# Altium PCB Main.PcbDoc (part 2 of 2)
Units mm, origin at the board's own origin, x right, y up, seen from the top; angles counter-clockwise.
Board outline 97 x 100 mm, 2 copper layers (Top Layer, Bottom Layer); 183 components, 114 nets, 627 pads, 356 vias.
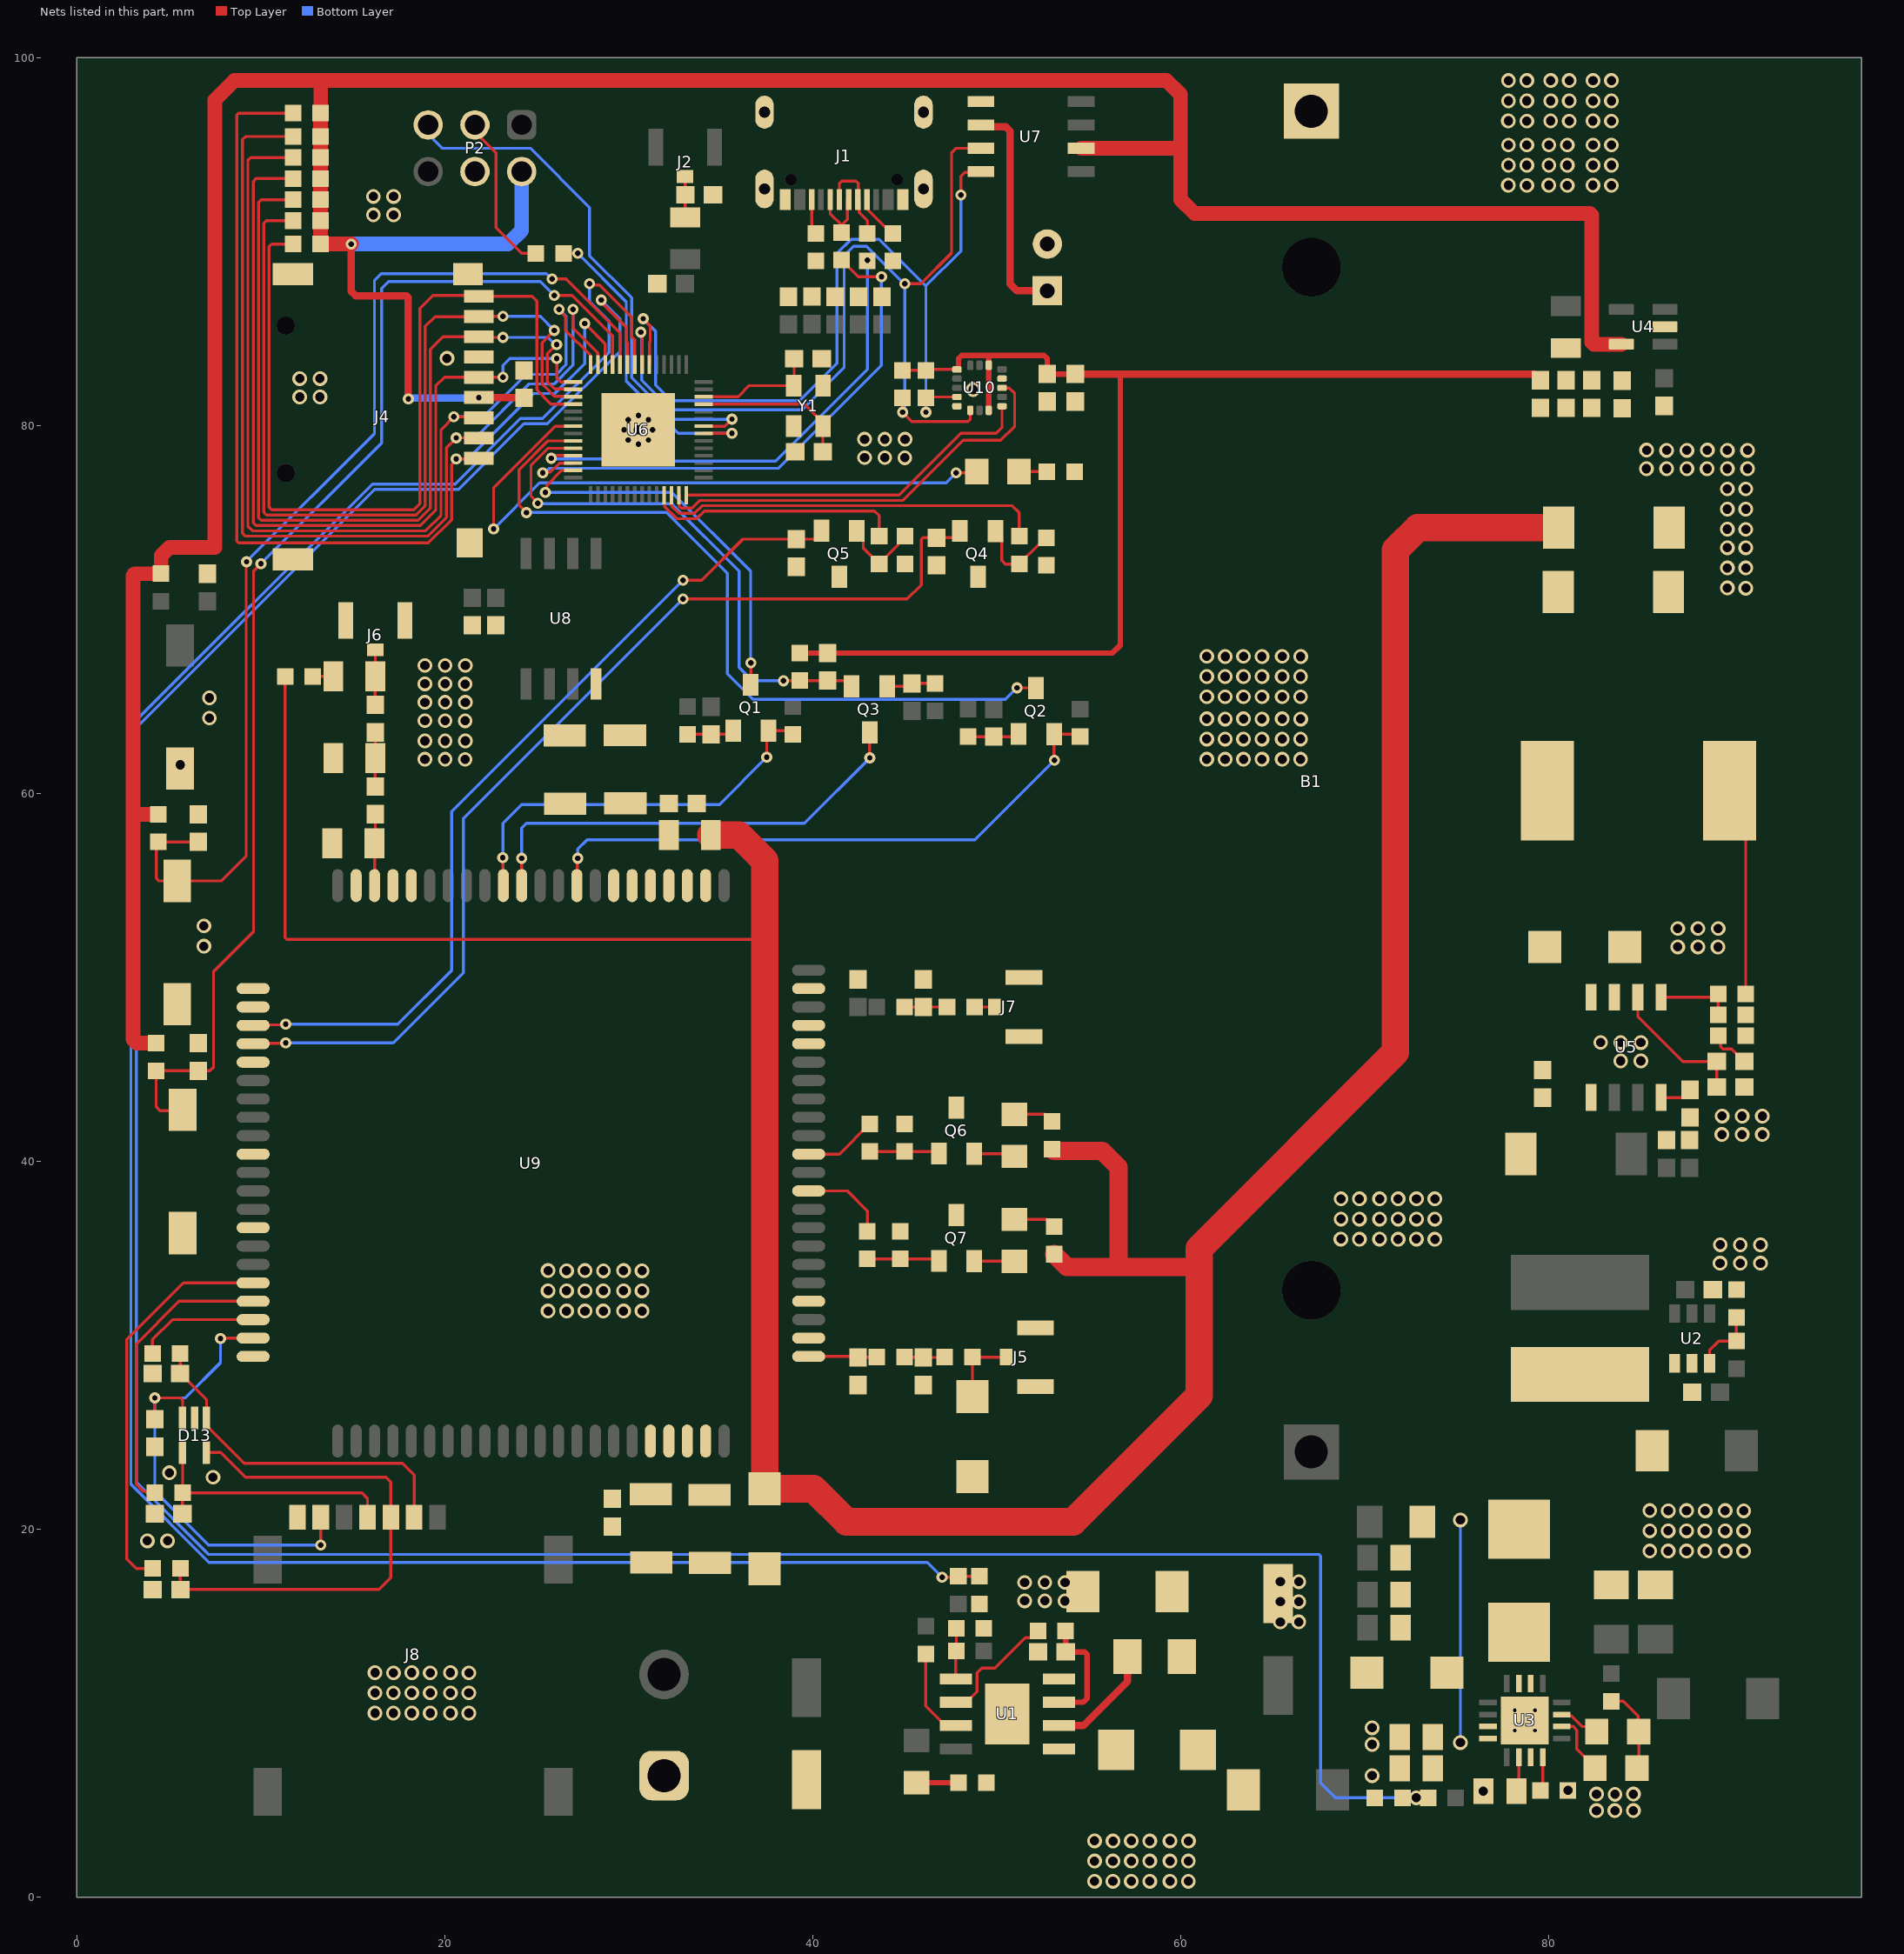
[diagram p2: the nets of this part, all layers, seen from the top]

## Via types
v1: diameter 0.8, hole 0.5, Top Layer to Bottom Layer, tented both sides, 283 vias
v2: diameter 0.6, hole 0.3, Top Layer to Bottom Layer, tented both sides, 69 vias
v3: diameter 0.5, hole 0.2, Top Layer to Bottom Layer, 4 vias

## Nets (pads, with @x,y where several pads share a name; then routed paths per layer and width w, separated by ;. In a path a pad name is that pad's centre, name@x,y a point inside that pad or via, vN(x,y) a via of type N, cw(c..) or ccw(c..) an arc to the next point about the centre after c; other vN are vias at no path point) (continued)
GND: B1.2 C2.2 C3.1 C4.1 C5.1 C6.2 C7.1 C8.1 C9.1 C10.1 C11.1 C12.1 C13.1 C14.1 C15.1 C16.1 C18.2 C19.2 C20.1 C22.1 C23.1 C24.2 C25.1 C26.1 C27.1 C28.1 C29.2 C30.1 C31.1 C32.1 C33.1 C34.1 C35.2 C36.1 C37.1 C38.2 C39.2 C40.1 C41.1 C42.1 C43.2 C44.1 C45.1 C48.1 C49.1 C50.2 C51.2 C52.2 C53.2 C54.1 C55.2 C56.2 C57.1 C58.2 C59.2 C64.2 C65.2 C66.1 C67.1 D4.1 D6.1 D9.1 D11.1 D12.1 D13.2 J1.A1/B12 J1.A12/B1 J1.Shell J3.2 J4.6 J4.Shell J5.2 J6.2 J7.2 J8.5 L8.1 L9.1 P1.1 P2.4 Q4.3 Q5.3 Q6.3 Q7.3 R1.2 R6.1 R7.1 R9.2 R13.1 R14.1 R16.1 R17.1 R20.2 R21.2 R25.2 R52.2 R53.2 R58.1 R59.1 SW1.1 SW2.1 SW3.1 U1.4 U1.EXP U2.2 U3.7 U3.11 U3.17 U4.2 U5.7 U6.57 U7.5 U8.4 U9.1 U9.2 U9.5 U9.10 U9.14 U9.37 U9.40 U9.41 U9.43 U9.57 U9.58 U9.60 U9.61 U9.64 U9.65 U9.77 U9.78 U9.80 U9.81 U10.5 U10.12 Y1.2 Y1.4
  other v1: 55.312,0.86 56.312,0.86 57.312,0.86 58.312,0.86 59.412,0.86 60.412,0.86 55.312,1.96 56.312,1.96 57.312,1.96 58.312,1.96 59.412,1.96 60.412,1.96 56.318,3.048 58.318,3.048 60.418,3.048 55.312,3.06 57.312,3.06 59.412,3.06 82.6,4.7 83.6,4.7 84.6,4.7 83.606,5.588 82.6,5.6 84.6,5.6 76.45,5.75 81.05,5.8 70.4,6.6 70.4,8.3 70.4,9.2 16.2,10 17.2,10 18.2,10 19.2,10 20.3,10 21.3,10 16.2,11.1 17.2,11.1 18.2,11.1 19.2,11.1 20.3,11.1 21.3,11.1 17.206,12.188 19.206,12.188 21.306,12.188 16.2,12.2 18.2,12.2 20.3,12.2 65.412,14.96 66.412,14.96 65.412,16.06 66.412,16.06 51.512,16.106 52.612,16.106 53.7,16.1 51.512,17.106 52.612,17.106 53.712,17.106 66.418,17.148 65.412,17.16 85.494,18.812 86.494,18.812 87.494,18.812 88.494,18.812 89.594,18.812 90.594,18.812 3.825,19.366 4.925,19.366 85.494,19.912 86.494,19.912 87.494,19.912 88.494,19.912 89.594,19.912 90.594,19.912 86.5,21 88.5,21 90.6,21 85.494,21.012 87.494,21.012 89.594,21.012 7.391,22.826 5.025,23.066 25.612,31.86 26.612,31.86 27.612,31.86 28.612,31.86 29.712,31.86 30.712,31.86 25.612,32.96 26.612,32.96 27.612,32.96 28.612,32.96 29.712,32.96 30.712,32.96 25.612,34.06 26.618,34.048 27.612,34.06 28.618,34.048 29.712,34.06 30.718,34.048 89.312,34.46 90.412,34.46 91.512,34.46 90.412,35.46 91.512,35.46 89.325,35.466 69.712,35.76 71.812,35.76 73.812,35.76 68.706,35.772 70.806,35.772 72.806,35.772 68.712,36.86 69.712,36.86 70.812,36.86 71.812,36.86 72.812,36.86 73.812,36.86 68.712,37.96 69.712,37.96 70.812,37.96 71.812,37.96 72.812,37.96 73.812,37.96 89.412,41.46 90.512,41.46 91.612,41.46 89.425,42.466 90.512,42.46 91.612,42.46 83.912,45.46 85.012,45.46 82.825,46.466 83.912,46.46 85.012,46.46 87.012,51.66 88.112,51.66 89.2,51.654 6.9,51.7 87.012,52.66 88.112,52.66 89.212,52.66 6.9,52.8 5.612,61.56 18.912,61.86 20.012,61.86 21.1,61.854 61.412,61.86 62.412,61.86 63.412,61.86 64.412,61.86 65.512,61.86 66.512,61.86 18.912,62.86 20.012,62.86 21.112,62.86 61.412,62.96 62.412,62.96 63.412,62.96 64.412,62.96 65.512,62.96 66.512,62.96 18.912,63.96 20.012,63.96 21.1,63.954 61.412,64.06 62.418,64.048 63.412,64.06 64.418,64.048 65.512,64.06 66.518,64.048 7.2,64.1 18.912,64.96 20.012,64.96 21.112,64.96 7.2,65.2 61.412,65.26 62.412,65.26 63.412,65.26 64.412,65.26 65.512,65.26 66.512,65.26 18.912,65.96 20.012,65.96 21.1,65.954 61.412,66.36 62.412,66.36 63.412,66.36 64.412,66.36 65.512,66.36 66.512,66.36 18.912,66.96 20.012,66.96 21.112,66.96 61.412,67.46 62.418,67.448 63.412,67.46 64.418,67.448 65.512,67.46 66.518,67.448 89.706,71.172 90.712,71.16 89.712,72.26 90.712,72.26 89.712,73.36 90.712,73.36 89.706,74.372 90.712,74.36 89.712,75.46 90.712,75.46 89.712,76.56 90.712,76.56 85.312,77.66 86.412,77.66 87.512,77.66 88.612,77.66 89.712,77.66 90.812,77.66 42.812,78.26 43.912,78.26 45,78.254 85.325,78.666 86.412,78.66 87.512,78.66 88.625,78.666 89.712,78.66 90.812,78.66 42.812,79.26 43.912,79.26 45.012,79.26 30.518,79.772 12.112,81.56 13.212,81.56 48.712,81.96 12.112,82.56 13.212,82.56 20.112,83.66 16.112,91.46 17.212,91.46 16.112,92.46 17.212,92.46 78.812,93.06 81.012,93.06 83.412,93.06 77.806,93.072 80.006,93.072 82.406,93.072 77.812,94.16 78.812,94.16 80.012,94.16 81.012,94.16 82.412,94.16 83.412,94.16 77.812,95.26 78.812,95.26 80.012,95.26 81.012,95.26 82.412,95.26 83.412,95.26 77.806,96.572 78.812,96.56 80.106,96.572 81.112,96.56 82.406,96.572 83.412,96.56 77.812,97.66 78.812,97.66 80.112,97.66 81.112,97.66 82.412,97.66 83.412,97.66 77.812,98.76 78.812,98.76 80.112,98.76 81.112,98.76 82.412,98.76 83.412,98.76
  other v2: 30.518,78.994 29.968,79.222 31.068,79.222 29.74,79.772 31.296,79.772 29.968,80.322 31.068,80.322 30.518,80.549
  other v3: 78.15,9.05 79.25,9.05 78.15,10.15 79.25,10.15
GNSS-ANT: C46.2 L8.2 U9.79 | length 3.9
  Top Layer w0.16: U9.79@16.176,54.994 16.176,57.281 L8.2@16.164,57.293 16.217,57.346 C46.2@16.217,58.879
I2C0-SCL: R19.1 U6.6 U7.8 U10.4 | length 47.1
  Top Layer w0.16: v2(30.778,85.812) 31.16,85.43 31.16,84.581 31.118,84.539 U6.6@31.118,83.322 ; v2(46.145,80.732) R19.1@46.145,81.506 46.197,81.558 U10.4@47.835,81.558 ; v2(48.05,92.543) 48.05,93.559 48.264,93.773 49.095,93.773 U7.8@49.135,93.813
  Bottom Layer w0.16: v2(30.778,85.812) 31.461,85.129 31.461,82.208 32.302,81.367 39.287,81.367 41.319,83.399 41.319,89.368 42.081,90.13 43.605,90.13 46.145,87.59 ; v2(46.145,80.732) 46.145,87.59 ; v2(48.05,92.543) 48.05,89.495 46.145,87.59
I2C0-SDA: R18.1 U6.7 U7.7 U10.6 | length 50
  Top Layer w0.16: v2(30.653,85.081) 30.728,85.006 30.728,83.332 U6.7@30.718,83.322 ; R18.1@44.875,81.506 v2(44.875,80.732) 45.383,80.224 48.431,80.224 48.558,80.351 48.558,80.831 U10.6@48.56,80.833 ; v2(45.002,87.717) 45.875,87.717 47.542,89.384 47.542,94.829 47.796,95.083 U7.7@49.135,95.083
  Bottom Layer w0.16: v2(30.653,85.081) 30.698,85.036 30.698,82.463 32.302,80.859 39.414,80.859 41.7,83.145 41.7,89.241 42.208,89.749 42.925,89.749 44.957,87.717 v2(45.002,87.717) 45.002,81.046 44.959,81.003 44.959,80.816 v2@44.939,80.795
MAIN-ANT: C44.2 R36.1 U9.82 | length 3.7
  Top Layer w0.16: U9.82@39.776,29.394 42.403,29.394 C44.2@42.456,29.341 42.468,29.353 R36.1@43.484,29.353
NET-LIGHT: R54.2 U9.51 | length 4
  Top Layer w0.16: U9.51@39.776,40.394 41.444,40.394 R54.2@43.091,42.041
NetC1_1: C1.1 U1.2 | length 6.1
  Top Layer w0.4: U1.2@53.375,9.322 54.701,9.322 57.107,11.728 C1.1@57.107,13.076
NetC1_2: C1.2 D4.2 L2.1 U1.1
NetC3_2: C3.2 R2.2 U1.3 | length 6.4
  Top Layer w0.3: U1.3@53.375,10.592 54.701,10.592 54.899,10.79 54.899,13.203 54.772,13.33 C3.2@53.744,13.33 R2.2@53.744,14.473
NetC9_2: C9.2 C11.2 L3.2 R10.1 U3.8 | length 12.1
  Bottom Layer w0.16: v1(75.2,8.4) v1(75.2,20.5)
NetC16_2: C16.2 U3.10 | length 1.9
  Top Layer w0.16: C16.2@78.25,5.75 78.375,5.875 U3.10@78.375,7.6
NetC17_1: C17.1 U5.1 | length 0
  Top Layer w0.16: C17.1@79.667,43.462 C17.1@79.677,43.472
NetC17_2: C17.2 D9.2 L4.1 U5.8
NetC20_2: C20.2 C21.2 U5.6 | length 7.8
  Top Layer w0.16: U5.6@84.843,48.922 84.843,47.876 87.293,45.426 89.133,45.426 C21.2@89.139,45.432 C20.2@89.139,44.035
NetC21_1: C21.1 R16.2 | length 2.3
  Top Layer w0.16: R16.2@89.21,46.823 89.349,46.685 89.349,46.227 89.461,46.114 89.932,46.114 90.614,45.432 C21.1@90.639,45.432
NetC25_2: C25.2 U5.4 | length 1.7
  Top Layer w0.16: U5.4@86.113,43.472 87.279,43.472 87.674,43.867 C25.2@87.674,43.89
NetC27_2: C27.2 J2.1 L5.2 | length 6.6
  Top Layer w0.16: L5.2@33.058,91.326 J2.1@33.058,93.539 ; L5.2@33.058,91.326 J2.1@33.058,93.539 ; L5.2@33.058,91.326 J2.1@33.058,93.539
NetC45_2: C45.2 R36.2 R37.1 | length 2.2
  Top Layer w0.16: R36.2@44.984,29.353 46,29.353 C45.2@46.012,29.341 47.155,29.341 R37.1@47.167,29.353
NetC46_1: C46.1 C47.2 L9.2 | length 2.9
  Top Layer w0.16: C46.1@16.217,60.379 16.214,60.382 L9.2@16.214,61.915 16.217,61.918 C47.2@16.217,63.324
NetC47_1: C47.1 J6.1 L7.1 | length 3
  Top Layer w0.16: C47.1@16.217,64.824 16.214,64.827 L7.1@16.214,66.36 16.217,66.363 J6.1@16.217,67.808
NetC49_2: C49.2 R39.2 R40.1 | length 2.3
  Top Layer w0.16: R39.2@44.984,48.394 C49.2@46.012,48.394 R40.1@47.294,48.394
NetC50_1: C50.1 D13.4 J8.2 R43.1 | length 14.5
  Top Layer w0.16: C50.1@5.735,20.839 R43.1@5.735,21.982 ; D13.4@5.744,24.166 5.744,21.991 R43.1@5.735,21.982 ; J8.2@15.792,20.661 15.792,21.677 15.487,21.982 R43.1@5.735,21.982
NetC51_1: C51.1 D13.1 J8.3 R42.1 | length 19.2
  Top Layer w0.16: R42.1@5.608,29.551 C51.1@5.608,28.459 5.633,28.459 7.044,27.048 D13.1@7.044,26.046 7.044,25.631 9.093,23.582 17.697,23.582 18.332,22.947 J8.3@18.332,20.661
NetC52_1: C52.1 D13.5 J8.7 R41.1 | length 28.7
  Top Layer w0.16: R41.1@5.62,17.867 C52.1@5.62,16.724 16.427,16.724 17.062,17.359 J8.7@17.062,20.661 17.062,22.566 16.808,22.82 9.152,22.82 7.806,24.166 D13.5@7.044,24.166
NetC60_1: C60.1 Q3.2 R44.1 U6.24 | length 29.2
  Top Layer w0.16: v2(25.042,75.785) 25.042,75.822 24.679,76.185 24.679,77.845 25.606,78.772 U6.24@26.968,78.772 ; v2(38.398,66.127) 39.275,66.127 R44.1@39.287,66.139 C60.1@40.811,66.139 41.798,66.139 Q3.2@42.11,65.827
  Bottom Layer w0.16: v2(25.042,75.785) 25.063,75.764 32.317,75.764 35.985,72.096 35.985,66.856 36.714,66.127 v2(38.398,66.127)
NetC61_2: C61.2 Q1.1 R47.2 | length 2.6
  Top Layer w0.16: R47.2@33.191,63.218 C61.2@34.461,63.218 35.478,63.218 Q1.1@35.674,63.414
NetC62_2: C62.2 Q2.1 R48.2 | length 2.8
  Top Layer w0.16: R48.2@48.431,63.091 C62.2@49.828,63.091 51.039,63.091 Q2.1@51.188,63.24
NetC63_2: C63.2 Q3.1 R49.2 | length 2.7
  Top Layer w0.16: Q3.1@44.036,65.821 45.216,65.821 C63.2@45.383,65.988 R49.2@46.653,65.988
NetD1_1: D1.1 L1.2 U2.1
NetD2_1: D2.1 L2.2
NetD3_2: D3.2 R1.1 | length 2.3
  Top Layer w0.3: D3.2@45.628,6.218 R1.1@47.926,6.218
NetD6_2: D6.2 L3.1 U3.2 U3.3
NetD7_1: D7.1 D8.1 R11.1 | length 4.7
  Top Layer w0.16: R11.1@83.4,10.65 84.05,10.65 84.1,10.6 84.855,9.845 84.855,9.045 D8.1@84.9,9 84.9,7.1 D7.1@84.8,7
NetD7_2: D7.2 U3.14 | length 3.4
  Top Layer w0.16: U3.14@80.7,9.275 81.325,9.275 81.527,9.073 81.527,8.05 82.514,7.063 D7.2@82.514,7
NetD8_2: D8.2 U3.15 | length 2.3
  Top Layer w0.16: U3.15@80.7,9.925 80.77,9.855 81.245,9.855 81.833,9.267 82.347,9.267 D8.2@82.614,9
NetD10_2: D10.2 R25.1 | length 1.5
  Top Layer w0.16: D10.2@51.197,77.497 R25.1@52.721,77.497
NetD11_2: D11.2 J5.1 R37.2 | length 4
  Top Layer w0.16: D11.2@48.679,27.21 48.679,29.341 R37.2@48.667,29.353 J5.1@50.508,29.353
NetD14_1: D14.1 R50.1 | length 2.2
  Top Layer w0.16: D14.1@50.965,42.561 52.604,42.561 R50.1@52.997,42.168
NetD14_2: D14.2 Q6.2 | length 2.3
  Top Layer w0.16: Q6.2@48.775,40.422 50.818,40.422 D14.2@50.965,40.275
NetD15_1: D15.1 R51.1 | length 2.3
  Top Layer w0.16: D15.1@50.965,36.846 52.731,36.846 R51.1@53.124,36.453
NetD15_2: D15.2 Q7.2 | length 2.2
  Top Layer w0.16: Q7.2@48.775,34.58 50.945,34.58 D15.2@50.965,34.56
NetJ1_A5: J1.A5 R20.1 | length 2.5
  Top Layer w0.16: J1.A5@42.944,92.296 43.014,92.226 43.014,91.713 43.906,90.821 43.991,90.821 R20.1@44.361,90.451
NetJ1_B5: J1.B5 R21.1 | length 1.9
  Top Layer w0.16: J1.B5@39.944,92.296 39.944,90.677 R21.1@40.17,90.451
NetJ3_1: J3.1 U7.6 | length 12.2
  Top Layer w0.4: U7.6@49.135,96.353 49.235,96.253 50.483,96.253 50.717,96.019 50.717,87.717 51.098,87.336 J3.1@52.749,87.336
NetJ7_1: J7.1 R40.2 | length 1.1
  Top Layer w0.16: R40.2@48.794,48.394 J7.1@49.873,48.394
NetL7_2: L7.2 R38.2 | length 1.1
  Top Layer w0.16: R38.2@12.82,66.365 13.93,66.365 L7.2@13.934,66.36
NetQ1_3: Q1.3 U6.27 | length 21.3
  Top Layer w0.16: v2(25.464,76.377) 25.537,76.449 25.537,76.748 26.355,77.566 26.962,77.566 U6.27@26.968,77.572 ; Q1.3@36.619,65.909 36.629,65.919 v2(36.629,67.1)
  Bottom Layer w0.16: v2(25.464,76.377) 32.339,76.377 36.62,72.096 36.62,67.109 v2(36.629,67.1)
NetQ2_3: Q2.3 U6.23 | length 41.5
  Top Layer w0.16: v2(24.428,75.271) 24.025,75.674 24.025,77.596 25.6,79.172 U6.23@26.968,79.172 ; v2(51.098,65.746) 52.122,65.746 Q2.3@52.133,65.735
  Bottom Layer w0.16: v2@24.428,75.271 24.435,75.278 32.041,75.278 35.35,71.969 35.35,66.508 36.747,65.111 50.463,65.111 v2(51.098,65.746)
NetQ4_1: Q4.1 R52.1 R56.2 | length 4.8
  Top Layer w0.16: Q4.1@49.918,74.273 50.263,73.928 50.263,72.677 50.463,72.477 51.213,72.477 R56.2@51.225,72.489 52.274,73.538 52.327,73.538 R52.1@52.697,73.908
NetQ5_1: Q5.1 R53.1 R57.2 | length 4.4
  Top Layer w0.16: Q5.1@42.397,74.278 42.742,73.933 42.742,73.352 R57.2@43.605,72.489 44.632,73.516 44.632,73.619 R53.1@45.002,73.989
NetQ6_1: Q6.1 R54.1 R58.2 | length 3.8
  Top Layer w0.16: R54.1@43.091,40.541 R58.2@44.996,40.541 46.736,40.541 Q6.1@46.85,40.427
NetQ7_1: Q7.1 R55.1 R59.2 | length 3.9
  Top Layer w0.16: R55.1@42.964,34.699 R59.2@44.742,34.699 46.736,34.699 Q7.1@46.85,34.585
NetR2_1: R2.1 U1.6 | length 6.7
  Top Layer w0.16: U1.6@47.775,10.592 47.995,10.812 48.571,10.812 48.93,11.171 48.93,12.187 49.184,12.441 49.892,12.441 51.554,14.103 51.874,14.103 R2.1@52.244,14.473
NetR3_1: R3.1 R6.2 U1.5 | length 2.7
  Top Layer w0.16: U1.5@47.775,11.862 47.775,13.368 R3.1@47.793,13.386 47.799,13.392 R6.2@47.799,14.6
NetR4_1: R4.1 R7.2 U2.3 | length 3.7
  Top Layer w0.16: U2.3@88.745,29.019 88.745,29.733 89.242,30.23 R4.1@90.208,30.23 R7.2@90.208,31.524
NetR5_1: R5.1 U1.7 | length 4.9
  Top Layer w0.16: R5.1@46.136,13.227 46.136,10.385 47.2,9.322 U1.7@47.775,9.322
NetR8_2: R8.2 R9.1 U6.8 | length 133.7
  Top Layer w0.16: v2(27.857,87.717) 27.934,87.64 28.397,87.64 30.146,85.891 30.146,84.838 30.318,84.666 U6.8@30.318,83.322 ; v2(47.025,17.394) 47.864,17.394 R8.2@47.908,17.438 R9.1@49.051,17.438
  Bottom Layer w0.16: v2(27.857,87.717) 27.857,86.746 28.918,85.685 28.918,83.985 25.317,80.384 24.111,80.384 20.555,76.828 16.054,76.828 2.932,63.706 2.932,22.447 7.179,18.2 46.219,18.2 v2(47.025,17.394)
NetR12_1: R12.1 R13.2 U6.9 | length 168.4
  Top Layer w0.16: v2(28.492,86.828) 28.492,86.713 29.859,85.346 29.859,84.573 29.918,84.514 U6.9@29.918,83.322 ; R13.2@72.05,5.4 v1(72.8,5.4) R12.1@73.45,5.4
  Bottom Layer w0.16: v2(28.492,86.828) 29.508,85.812 29.508,84.034 25.571,80.097 24.301,80.097 20.745,76.541 16.173,76.541 3.219,63.587 3.219,22.566 7.155,18.63 67.506,18.63 67.6,18.536 67.6,6.2 68.4,5.4 v1(72.8,5.4)
NetR14_2: R14.2 U3.12 | length 1.9
  Top Layer w0.16: R14.2@79.55,5.8 79.675,5.925 U3.12@79.675,7.6
NetR15_1: R15.1 R17.2 U5.5 | length 4.3
  Top Layer w0.16: U5.5@86.113,48.922 89.023,48.922 R15.1@89.21,49.109 R17.2@89.21,47.966
NetR22_1: R22.1 U6.49 | length 17.3
  Top Layer w0.16: R22.1@26.448,89.368 v2(27.222,89.368) ; U6.49@34.068,79.572 34.077,79.58 35.596,79.58 v2(35.604,79.589)
  Bottom Layer w0.16: v2(27.222,89.368) 29.859,86.731 29.859,82.413 32.683,79.589 v2(35.604,79.589)
NetR23_1: R23.1 U6.26 | length 30.1
  Top Layer w0.16: v2(25.317,77.43) 25.362,77.475 25.743,77.475 26.22,77.952 26.948,77.952 U6.26@26.968,77.972 ; R23.1@41.567,89.002 42.471,88.098 v2(43.732,88.098)
  Bottom Layer w0.16: v2(25.317,77.43) 25.436,77.43 25.689,77.683 25.868,77.683 25.869,77.684 38.144,77.684 43.732,83.272 v2(43.732,88.098)
NetR24_1: R24.1 U6.25 | length 26.5
  Top Layer w0.16: v2(25.778,78.227) 25.897,78.227 26.045,78.375 26.965,78.375 U6.25@26.968,78.372
  Bottom Layer w0.16: v2(25.778,78.227) 25.815,78.19 31.897,78.19 32.02,78.067 37.982,78.067 42.97,83.054 v2(42.97,88.987)
NetR56_1: R56.1 U6.40 | length 21.3
  Top Layer w0.16: U6.40@32.318,76.222 32.338,76.202 32.338,75.613 32.723,75.228 33.554,75.228 33.974,75.648 50.849,75.648 51.225,75.271 R56.1@51.225,73.989
NetR57_1: R57.1 U6.39 | length 14
  Top Layer w0.16: U6.39@31.918,76.222 31.938,76.202 31.938,75.607 32.604,74.941 33.673,74.941 34.093,75.361 43.351,75.361 43.605,75.107 R57.1@43.605,73.989
NetU6_41: U6.41 U10.11 | length 23.3
  Top Layer w0.16: U6.41@32.718,76.222 32.738,76.202 32.738,75.619 32.842,75.515 33.435,75.515 33.855,75.935 44.904,75.935 48.177,79.208 50.209,79.208 50.971,79.97 50.971,81.748 50.673,82.046 50.297,82.046 U10.11@50.285,82.058
NetU6_42: U6.42 U10.9 | length 19.8
  Top Layer w0.16: U6.42@33.118,76.222 44.683,76.222 48.05,79.589 49.955,79.589 50.285,79.919 U10.9@50.285,81.058
OSCIN: C28.2 U6.54 Y1.1 | length 6.6
  Top Layer w0.16: U6.54@34.068,81.572 35.936,81.572 36.541,82.177 Y1.1@38.957,82.177 38.982,82.201 C28.2@38.982,83.639
OSCOUT: C29.1 U6.53 Y1.3 | length 8.5
  Top Layer w0.16: U6.53@34.068,81.172 39.531,81.172 40.557,80.146 Y1.3@40.557,79.97 40.545,79.958 C29.1@40.545,78.573
PWR-KEY: C65.1 Q5.2 U9.3 | length 47.2
  Top Layer w0.16: U9.3@9.576,47.394 9.608,47.426 11.315,47.426 v2(11.347,47.458) ; v2(32.937,71.588) 33.953,71.588 36.195,73.83 C65.1@39.101,73.83 40.127,73.83 40.472,74.175 Q5.2@40.472,74.284
  Bottom Layer w0.16: v2(11.347,47.458) 17.443,47.458 20.364,50.379 20.364,59.015 v2(32.937,71.588)
RESET: C64.1 Q4.2 U9.4 | length 56.3
  Top Layer w0.16: U9.4@9.576,46.394 9.6,46.418 11.323,46.418 v2(11.347,46.442) ; v2(32.937,70.572) 45.129,70.572 45.891,71.334 45.891,73.814 45.985,73.908 C64.1@46.728,73.908 47.648,73.908 47.993,74.253 Q4.2@47.993,74.279
  Bottom Layer w0.16: v2(11.347,46.442) 17.189,46.442 20.999,50.252 20.999,58.634 v2(32.937,70.572)
SD-CD: J4.9 R32.1 U6.18 | length 48.4
  Top Layer w0.16: R32.1@11.74,89.876 10.59,89.876 10.44,89.726 10.44,75.578 10.59,75.428 18.315,75.428 18.642,75.755 18.642,86.376 19.348,87.082 21.795,87.082 J4.9@21.847,87.03 24.734,87.03 24.998,86.766 24.998,81.94 25.767,81.172 U6.18@26.968,81.172
SD-CLK: J4.5 R29.1 U6.15 | length 47.5
  Top Layer w0.16: R29.1@11.74,93.432 9.729,93.432 9.579,93.282 9.579,74.717 9.729,74.567 18.672,74.567 19.503,75.398 19.503,82.157 19.983,82.637 21.84,82.637 J4.5@21.847,82.63 21.854,82.637 v2(23.158,82.637) ; v2(26.079,83.653) 26.079,82.592 26.3,82.372 U6.15@26.968,82.372
  Bottom Layer w0.16: v2(23.158,82.637) 23.158,83.272 23.539,83.653 v2(26.079,83.653)
SD-CMD: J4.3 R28.1 U6.14 | length 54.5
  Top Layer w0.16: R28.1@11.74,94.575 9.442,94.575 9.292,94.425 9.292,74.532 9.544,74.28 18.791,74.28 18.942,74.28 19.79,75.128 19.79,79.777 v2(20.491,80.478) 21.799,80.478 J4.3@21.847,80.43 ; v2(26.206,86.32) 26.206,86.275 26.566,85.916 26.566,85.169 27.898,83.837 27.898,83.342 U6.14@27.918,83.322
  Bottom Layer w0.16: v2(20.491,80.478) 22.092,80.478 24.401,82.786 26.057,82.786 26.587,83.317 26.587,85.939 v2(26.206,86.32)
SD-DAT0: J4.7 R30.1 U6.16 | length 48.5
  Top Layer w0.16: R30.1@11.74,92.289 10.016,92.289 9.866,92.139 9.866,75.004 10.016,74.854 18.553,74.854 19.216,75.517 19.216,84.156 19.89,84.83 J4.7@21.847,84.83 21.881,84.796 v2(23.158,84.796) ; v2(26.079,84.415) 25.572,83.908 25.572,82.382 25.963,81.992 26.948,81.992 U6.16@26.968,81.972
  Bottom Layer w0.16: v2(23.158,84.796) 25.616,84.796 25.997,84.415 v2(26.079,84.415)
SD-DAT1: J4.8 R31.1 U6.17 | length 48.9
  Top Layer w0.16: R31.1@11.74,91.146 10.303,91.146 10.153,90.996 10.153,75.294 10.306,75.141 18.434,75.141 18.602,75.309 18.929,75.636 18.929,85.393 19.466,85.93 J4.8@21.847,85.93 21.856,85.939 v2(23.158,85.939) ; v2(25.952,85.177) 25.285,84.51 25.285,82.263 25.538,82.01 25.957,81.592 26.548,81.592 26.568,81.572 U6.17@26.968,81.572
  Bottom Layer w0.16: v2(23.158,85.939) 25.19,85.939 v2(25.952,85.177)
SD-DAT2: J4.1 R26.1 U6.12 | length 57.2
  Top Layer w0.16: R26.1@11.74,96.988 8.774,96.988 8.68,96.894 8.68,73.714 8.774,73.62 19.094,73.62 20.364,74.89 20.364,77.878 20.618,78.132 v2(20.618,78.192) 21.809,78.192 J4.1@21.847,78.23 ; v2(27.603,85.558) 28.718,84.443 U6.12@28.718,83.322
  Bottom Layer w0.16: v2(20.618,78.192) 21.253,78.192 24.809,81.748 25.976,81.748 27.603,83.375 v2(27.603,85.558)
SD-DAT3: J4.2 R27.1 U6.13 | length 56.1
  Top Layer w0.16: R27.1@11.74,95.718 9.155,95.718 9.005,95.568 9.005,74.143 9.155,73.993 19.061,73.993 20.077,75.009 20.077,78.794 v2(20.618,79.335) 21.842,79.335 J4.2@21.847,79.33 ; v2(26.968,86.32) 26.968,85.304 28.318,83.954 U6.13@28.318,83.322
  Bottom Layer w0.16: v2(20.618,79.335) 21.634,79.335 24.568,82.269 25.945,82.269 26.968,83.292 v2(26.968,86.32)
SIM-DTR: Q1.2 R45.2 U9.72 | length 22.1
  Top Layer w0.16: v2(23.145,56.512) 23.16,56.496 23.16,55.009 U9.72@23.176,54.994 ; v2(37.492,61.967) 37.492,63.302 Q1.2@37.599,63.409 38.715,63.409 R45.2@38.906,63.218
  Bottom Layer w0.16: v2(23.145,56.512) 23.158,56.525 23.158,58.38 24.174,59.396 34.921,59.396 v2(37.492,61.967)
SIM-RTS: U9.66
SIM-RX: Q2.2 R46.2 U9.68 | length 32.8
  Top Layer w0.16: U9.68@27.176,54.994 27.199,55.017 27.199,56.452 v2(27.222,56.475) ; v2(53.13,61.809) 53.114,61.825 Q2.2@53.114,63.235 54.383,63.235 R46.2@54.527,63.091
  Bottom Layer w0.16: v2(27.222,56.475) 27.222,56.983 27.73,57.491 48.812,57.491 v2(53.13,61.809)
SIM-TX: Q3.3 U9.71 | length 25
  Top Layer w0.16: U9.71@24.176,54.994 v2@24.175,56.474 ; Q3.3@43.091,63.327 43.091,61.942 v2(43.097,61.936)
  Bottom Layer w0.16: v2(24.174,56.475) 24.174,58.126 24.428,58.38 39.541,58.38 v2(43.097,61.936)
STATUS: R55.2 U9.49 | length 4.8
  Top Layer w0.16: U9.49@39.776,38.394 41.875,38.394 42.97,37.298 42.97,36.205 R55.2@42.964,36.199
U0RX: P2.5 U6.50 | length 29.2
  Top Layer w0.16: U6.50@34.069,79.971 35.221,79.971 35.601,80.351 v2(35.604,80.351)
  Bottom Layer w0.16: P2.5@19.094,96.353 19.37,96.077 19.37,95.569 19.856,95.083 24.637,95.083 27.857,91.863 27.857,89.241 30.146,86.952 30.146,82.609 32.404,80.351 v2(35.604,80.351)
U0TX: P2.3 R22.2 | length 8.8
  Top Layer w0.16: P2.3@21.634,96.353 21.634,95.972 22.777,94.829 22.777,90.765 24.174,89.368 R22.2@24.948,89.368
USB-D+: J1.A6 J1.B6 R23.2 | length 3.6
  Top Layer w0.16: J1.B6@40.944,92.296 40.944,91.533 R23.2@41.562,90.914 ; R23.2@41.562,90.506 R23.2@41.562,90.914 ; J1.A6@41.944,92.296 41.874,92.226 41.874,91.226 R23.2@41.562,90.914
USB-D-: J1.A7 J1.B7 R24.2 | length 5
  Top Layer w0.16: J1.A7@41.444,92.296 41.444,93.176 41.573,93.305 42.335,93.305 42.462,93.178 42.462,92.314 J1.B7@42.444,92.296 42.514,92.226 42.514,91.591 42.964,91.141 R24.2@42.964,90.451
USER-BUTTON-1: C39.1 R34.1 SW2.2 U6.10 | length 60.4
  Top Layer w0.16: C39.1@6.591,57.37 R34.1@4.432,57.37 4.311,57.249 4.311,55.397 4.462,55.247 SW2.2@5.448,55.247 7.847,55.247 9.2,56.6 9.2,72.577 v2(9.22,72.597) ; v2(25.825,87.971) 26.595,87.971 29.518,85.048 U6.10@29.518,83.322
  Bottom Layer w0.16: v2(9.22,72.597) 9.22,72.62 16.173,79.573 16.173,87.902 16.529,88.258 25.511,88.258 25.799,87.971 v2(25.825,87.971)
USER-BUTTON-2: C43.1 R35.1 SW3.2 U6.11 | length 68
  Top Layer w0.16: SW3.2@5.448,42.801 5.41,42.763 4.499,42.763 4.305,42.957 R35.1@4.305,44.924 7.224,44.924 7.424,45.124 7.424,50.324 9.6,52.5 9.6,72.1 v2(10,72.5) ; v2(25.952,87.082) 26.923,87.082 29.118,84.887 U6.11@29.118,83.322
  Bottom Layer w0.16: v2(10,72.5) 16.554,79.054 16.554,87.463 16.935,87.844 25.19,87.844 v2(25.952,87.082)
USER-LED: D10.1 U6.21 | length 35.5
  Top Layer w0.16: v2(22.65,74.382) 22.65,76.628 25.994,79.972 U6.21@26.968,79.972 ; v2(47.796,77.43) 48.844,77.43 D10.1@48.911,77.497
  Bottom Layer w0.16: v2(22.65,74.382) 25.152,76.884 47.248,76.884 v2(47.796,77.43) v2(47.796,77.43)
USIM-CLK: R42.2 U9.19 | length 6.7
  Top Layer w0.16: R42.2@4.108,29.551 4.108,30.313 5.189,31.394 U9.19@9.576,31.394
USIM-DATA: R41.2 U9.17 | length 21.7
  Top Layer w0.16: R41.2@4.12,17.867 3.231,17.867 2.711,18.387 2.711,30.313 5.792,33.394 U9.17@9.576,33.394
USIM-RST: R43.2 U9.18 | length 16.1
  Top Layer w0.16: R43.2@4.235,21.982 4.159,22.058 3.6,22.058 3.219,22.439 3.219,30.059 5.554,32.394 U9.18@9.576,32.394
USIM-VDD: C53.1 D13.3 J8.1 U9.20 | length 28
  Top Layer w0.16: C53.1@4.235,25.983 v2(4.235,27.138) 5.632,27.138 5.744,27.026 D13.3@5.744,26.046 ; v2(7.803,30.37) 7.821,30.388 9.57,30.388 U9.20@9.576,30.394 ; v2(13.252,19.137) J8.1@13.252,20.661
  Bottom Layer w0.16: v2(7.803,30.37) 7.803,29.055 5.886,27.138 v2(4.235,27.138) 4.235,22.058 7.156,19.137 v2(13.252,19.137)
V-MCU: C13.2 C33.2 C34.2 C35.1 C40.2 C60.2 C66.2 C67.2 J4.4 L6.2 P2.2 R18.2 R19.2 R26.2 R27.2 R28.2 R29.2 R30.2 R31.2 R32.2 R33.2 R34.2 R35.2 R44.2 U4.5 U7.2 U10.1 U10.8 U10.14 | length 266.4
  Top Layer w0.16: C40.2@24.277,81.53 C40.2@24.301,81.506 ; R18.2@44.875,83.006 R19.2@46.145,83.006 46.197,83.058 U10.1@47.835,83.058 ; 59.845,95.083 59.988,95.227
  Top Layer w0.3: R44.2@39.287,67.639 C60.2@40.811,67.639 56.291,67.639 56.712,68.06 56.712,82.808 ; U10.1@47.898,83.058 47.923,83.083 47.923,83.644 48.099,83.82 49.564,83.82 ; U10.8@49.564,80.833 49.564,83.82 ; C67.2@54.267,82.808 C66.2@52.743,82.808 52.743,83.644 52.567,83.82 49.564,83.82 ; C33.2@79.219,82.808 79.544,82.483 C33.2@79.544,82.472
  Top Layer w0.4: v2(14.912,89.876) 14.912,87.294 15.147,87.06 17.912,87.06 18.012,86.96 v2(18.012,81.46) ; v2(21.847,81.53) C40.2@24.277,81.53 ; C67.2@54.267,82.808 56.712,82.808 C33.2@79.219,82.808
  Top Layer w0.8: R35.2@4.305,46.424 3.252,46.424 3.041,46.634 3.041,59.08 ; R34.2@4.432,58.87 3.252,58.87 3.041,59.08 ; v2(14.912,89.876) R32.2@13.24,89.876 R31.2@13.24,91.146 R30.2@13.24,92.289 R29.2@13.24,93.432 R28.2@13.24,94.575 R27.2@13.24,95.718 R26.2@13.24,96.988 13.252,97 13.252,98.639 13.379,98.766 ; U7.2@54.585,95.083 59.845,95.083 ; U4.5@83.948,84.429 82.453,84.429 82.34,84.542 82.34,91.433 82.246,91.527 60.75,91.527 59.988,92.289 59.988,95.227 59.988,98.004 59.226,98.766 13.379,98.766 ; 3.041,59.08 3.041,71.857 3.135,71.951 R33.2@4.559,71.951 4.574,71.966 4.574,72.932 5.027,73.385 7.496,73.385 7.496,97.708 8.553,98.766 13.379,98.766
  Bottom Layer w0.16: v2(18.012,81.46) v2@18.047,81.495 ; v2@21.812,81.495 v2(21.847,81.53)
  Bottom Layer w0.4: v2@18.047,81.495 v2@21.812,81.495
  Bottom Layer w0.8: v2(14.912,89.876) 23.428,89.876 24.174,90.622 P2.2@24.174,93.813
V-SIM: C18.1 C19.1 C57.2 C58.1 C59.1 D12.2 L4.2 L10.2 R15.2 R38.1 R50.2 R51.2 U9.38 U9.39 | length 193.8
  Top Layer w0.16: R38.1@11.32,66.365 11.32,52.154 11.413,52.06 37.382,52.06 ; L4.2@89.833,60.158 90.71,59.281 R15.2@90.71,49.109
  Top Layer w1: R50.2@53.105,40.56 55.734,40.56 56.612,39.681 56.612,34.26 ; R51.2@53.124,34.953 53.817,34.26 56.612,34.26 ; 61.004,34.26 56.612,34.26
  Top Layer w1.5: L10.2@34.458,57.745 35.985,57.745 37.382,56.348 37.382,52.06 D12.2@37.382,22.201 40.033,22.201 41.827,20.407 54.146,20.407 61.004,27.265 61.004,34.26 61.004,35.266 71.672,45.934 71.672,73.239 72.887,74.453 C18.1@80.538,74.453
V-SIM-62-63: C54.2 C55.1 C56.1 L10.1 U9.62 U9.63
pads on no net: B1. J1.A4/B9 J1.A8 J1.A9/B4 J1.B8 J1.MH1 J1.MH2 J2.2 J4.MH1 J4.MH2 J8.4 J8.6 J8.8 U2.6 U3.6 U3.13 U4.4 U5.3 U6.19 U6.22 U6.28 U6.36 U6.37 U6.38 U6.43 U6.44 U6.45 U6.47 U6.48 U6.51 U6.52 U7.1 U7.3 U7.4 U9.6 U9.7 U9.8 U9.9 U9.11 U9.12 U9.13 U9.16 U9.21 U9.22 U9.23 U9.24 U9.25 U9.26 U9.27 U9.28 U9.29 U9.30 U9.31 U9.32 U9.33 U9.34 U9.35 U9.36 U9.42 U9.44 U9.45 U9.46 U9.47 U9.48 U9.50 U9.52 U9.53 U9.54 U9.55 U9.56 U9.67 U9.69 U9.70 U9.73 U9.74 U9.75 U9.76 U9.83 U9.84 U9.85 U9.86 U9.87 U10.2 U10.3 U10.7 U10.10 U10.13 U10.15 U10.16

## Polygon pours and split planes (outlines as drawn)
BATTERY+ on Top Layer "BATTERY+_L01_P047" (solid, pour order 47): 70.6,13.8 70.77,13.97 70.77,19.11 70.96,19.3 71.1,19.3 71.4,19.6 71.4,22.2 71.8,22.6 76.4,22.6 76.752,22.952 76.752,25.9 64.674,25.9 64.3,25.526 64.3,21.8 65.3,20.8 67.2,20.8 68,20 68,14.1 68.3,13.8 68.6,13.8
NetC9_2 on Top Layer "NETC9_2_L01_P046" (solid, pour order 46): 80.4,18.2 80.4,21.9 80.1,22.2 72.6,22.2 72.2,21.8 72.2,19.6 72.4,19.4 75.1,19.4 76.3,18.2
GND on Top Layer "GND_L01_P050" (solid, remove dead copper, pour order 50): 0,100 97,100 97,0 0,0
NetC9_2 on Top Layer "NETC9_2_L01_P048" (solid, pour order 48): 77.2,8.5 77.2,8.8 77.1,8.9 74.7,8.9 74.6,9 74.6,9.3 74.3,9.6 73.1,9.6 73.1,6.36 73.079,6.34 73.2,6.219 74.319,6.219 75.8,7.7 75.8,8.3 75.9,8.4 77.1,8.4
+5V-BUCK on Top Layer "+5V-BUCK_L01_P042" (solid, pour order 42): 64.4,13.3 66.3,13.3 66.3,11.5 66.9,10.9 69.4,10.9 69.4,4.3 69.8,3.9 85.9,3.9 85.9,11.7 82.6,11.7 82.6,10.8 82.2,10.4 80.2,10.4 80.2,10.9 80,11.1 79.5,11.1 79.5,12.2 79.9,12.2 79.7,12.2 81.1,12.2 81.4,12.5 81.4,15.1 81.7,15.4 81.724,15.376 88.524,15.376 89,14.9 89,1.3 88.5,0.8 67.1,0.8 66.3,1.6 66.3,8 64.4,9.9
NetD6_2 on Top Layer "NETD6_2_L01_P045" (solid, pour order 45): 79.2,11.1 79.2,12.2 79.3,12.3 80.1,12.3 80.2,12.4 80.2,16.1 80,16.3 76.3,16.3 75.3,15.3 75.3,14.3 74.9,13.9 73.6,13.9 73.3,13.6 73.3,11.4 73.5,11.2 76.3,11.2 77.4,12.3 78.1,12.3 78.2,12.2 78.2,11.1
+5V-BUCK on Top Layer "+5V-BUCK_L01_P043" (solid, pour order 43): 69.4,10.9 76.3,10.9 77.5,12.1 78,12.1 78,11.1 77.9,11 77.4,11 77.3,10.9 77.3,10.2 69.4,10.2
+5V on Top Layer "+5V_L01_P011" (solid, pour order 11): 93.389,34.885 91.865,36.409 83.483,36.409 82.721,37.171 82.848,37.298 82.848,44.283 83.102,44.537 83.864,44.537 84.372,44.029 84.372,42.124 84.626,41.87 85.388,41.87 85.642,41.616 85.642,40.346 85.769,40.219 91.992,40.219 93.389,41.616
V-SIM on Top Layer "V-SIM_L01_P032" (solid, pour order 32): 91.23,57.237 91.611,57.618 91.611,68.667 90.976,69.302 84.118,69.302 82.848,70.572 82.848,75.6 78.53,75.6 78.53,67.143 79.165,66.508 87.547,66.508 87.801,66.254 87.801,57.491 88.055,57.237
+5V on Top Layer "+5V_L01_P009" (solid, pour order 9): 90.7,8.7 96.437,8.7 96.437,85.677 92.881,86.788 92.881,81.494 92.881,80.529 92.881,13.381 92.1,12.6 90.7,12.6
+5V on Top Layer "+5V_L01_P010" (solid, pour order 10): 93.262,21.169 92.246,22.185 89.579,22.185 88.817,22.947 88.759,27.986 89.579,28.281 89.579,29.029 89.72,29.17 92.373,29.17 93.262,30.059
+5V on Top Layer "+5V_L01_P012" (solid, pour order 12): 93.261,77.986 91.992,79.462 90.976,80.478 89.579,82.002 85.134,82.002 85.007,82.129 85.007,84.669 85.134,84.796 87.166,84.796 87.293,84.923 87.293,85.812 87.166,85.939 85.515,85.939 85.388,86.066 85.388,86.701 85.515,86.828 92.881,86.828 93.261,86.543
NetC1_2 on Top Layer "NETC1_2_L01_P014" (solid, pour order 14): 52.359,8.377 52.613,8.631 54.772,8.631 55.534,9.393 56.804,9.393 58.963,11.552 58.963,14.473 58.963,17.8 61.376,17.8 61.376,13.965 61.376,11.425 58.455,8.504 58.455,7.234 57.82,6.599 54.645,6.599 54.264,6.98 52.613,6.98 52.359,7.234
NetD2_1 on Top Layer "NETD2_1_L01_P015" (solid, pour order 15): 59.598,9.139 59.979,9.52 62.392,9.52 64.678,7.234 64.678,4.694 64.297,4.313 61.376,4.313 59.598,6.091
+12V on Top Layer "+12V_L01_P021" (solid, pour order 21): 29.245,13.838 30.007,14.6 42.608,14.6 46.764,8.758 48.676,8.758 48.93,8.504 48.93,7.615 48.803,7.488 44.231,7.488 42.707,9.012 30.007,9.012 29.245,9.774
BATTERY+ on Top Layer "BATTERY+_L01_P026" (solid, pour order 26): 64.2,25.5 66.727,28.027 70.148,28.027 75.736,33.615 75.736,35.266 76.244,35.774 87.166,35.774 88.182,34.758 88.182,32.472 88.309,32.345 89.198,32.345 89.325,32.218 89.325,31.075 89.198,30.948 87.293,30.948 87.293,32.218 87.146,32.366 86.298,32.366 86.15,32.218 86.15,31.075 85.896,30.821 77.133,30.821 76.752,30.44 76.752,25.5
BATTERY+ on Top Layer "BATTERY+_L01_P027" (solid, pour order 27): 85.261,30.821 85.642,30.44 88.944,30.44 89.325,30.821 89.325,31.075 85.388,31.075
NetD1_1 on Top Layer "NETD1_1_L01_P029" (solid, pour order 29): 77.514,29.932 77.895,30.313 85.388,30.313 85.769,29.932 87.039,29.932 87.293,29.678 87.293,28.281 86.912,27.9 86.912,23.201 86.404,22.693 80.562,22.693 77.514,25.741
NetC17_2 on Top Layer "NETC17_2_L01_P030" (solid, pour order 30): 82.975,49.617 82.975,47.839 80.562,45.426 80.562,44.537 80.44,44.415 77.636,44.415 77.387,44.664 77.387,63.079 78.022,63.714 81.324,63.714 81.705,63.333 81.705,51.522
NetC17_1 on Top Layer "NETC17_1_L01_P031" (solid, pour order 31): 82.594,42.759 82.467,42.632 79.165,42.632 79.038,42.759 79.038,43.837 79.103,43.902 81.451,43.902 81.959,44.41 82.467,44.41 82.594,44.283
V-MCU on Top Layer "V-MCU_L01_P033" (solid, pour order 33): 79.038,84.923 78.784,84.669 78.784,82.129 78.988,81.926 84.677,81.926 84.88,82.129 84.88,84.796 84.753,84.923
V-SIM on Top Layer "V-SIM_L01_P034" (solid, pour order 34): 38.462,21.232 38.652,21.423 38.652,23.074 38.462,23.264 34.017,23.264 33.636,23.645 33.636,25.804 33.509,25.931 31.985,25.931 31.858,25.804 31.858,23.645 31.477,23.264 28.683,23.264 28.556,23.137 28.556,21.359 28.683,21.232
V-SIM-62-63 on Top Layer "V-SIM-62-63_L01_P036" (solid, pour order 36): 25.317,60.412 25.063,60.158 25.063,58.888 25.317,58.634 31.159,58.634 31.413,58.38 31.413,56.856 31.794,56.475 31.794,53.935 32.048,53.681 33.445,53.681 33.699,53.935 33.699,56.221 32.81,57.11 32.81,60.285 32.683,60.412
+3.3V-MCU on Top Layer "+3.3V-MCU_L01_P037" (solid, pour order 37): 38.223,86.053 38.005,86.053 34.461,82.51 33.572,82.51 33.572,81.875 34.588,81.875 37.702,84.989 38.219,84.989
+3.3V-MCU on Top Layer "+3.3V-MCU_L01_P038" (solid, pour order 38): 33.572,82.51 32.937,82.51 32.81,82.637 32.81,83.907 32.735,83.982 32.227,83.982 32.175,83.93 32.175,81.875 33.572,81.875
GND on Bottom Layer "GND_L02_P041" (solid, remove dead copper, pour order 41): 0,0 0,100 97,100 97,0

## Keep-outs
Keep-Out Layer:
  lines w0.254: -203.797,96.536 -203.67,96.663 ; -103.848,-4.81 -103.721,-4.683

## Silkscreen, mask and mechanical layers (free items; w line width, h text height)
Top Overlay:
  text "B-" at 65.6,81.7 h2.5
  text "SD CARD" at 5.912,77.06 h1 r90
  text "GNSS" at 14.412,71.36 h1
  text "RESET" at 3.1,62.8 h1 r90
  text "IVTS V1" at 43.5,58.3 h1.2
  text "Design by LT_AN" at 40.1,56.333 h1
  text "AUX" at 50.312,50.76 h1
  text "BUTTON 0" at 3,48.2 h1 r90
  text "B+" at 64.7,37.3 h2.51
  text "BUTTON 1" at 3.2,36 h1 r90
  text "MAIN" at 50.512,31.46 h1
  text "P+" at 28,11.6 h1
  text "SIM CARD" at 10.012,8.06 h1 r90
  text "GND" at 27.5,6.6 h1
  text "INPUT" at 35.8,1.4 h1
Mechanical 13:
  circle w0.013: c94.4,2.6 r1.6
  circle w0.013: c94.4,97.4 r1.6
  circle w0.013: c2.6,2.6 r1.6
  circle w0.013: c2.6,97.4 r1.6
  lines w0.013: 0,0 0,100 97,100 97,0 0,0

## Text inside footprints (layer, text, board x,y; h text height)
L4: Top Overlay "REFDES" at 82.658,59.523 h0.9; Top Overlay "RefDes" at 82.594,57.491 h0.9